# Altium PCB Jukebox PCB.PCBDOC (part 2 of 3)
Units mil, origin at the board's own origin, x right, y up, seen from the top; angles counter-clockwise.
Board outline 8310.03 x 5810.03 mil, 2 copper layers (Top Layer, Bottom Layer); 100 components, 181 nets, 737 pads, 268 vias.
Unrouted connection lines stored in the file: 109.
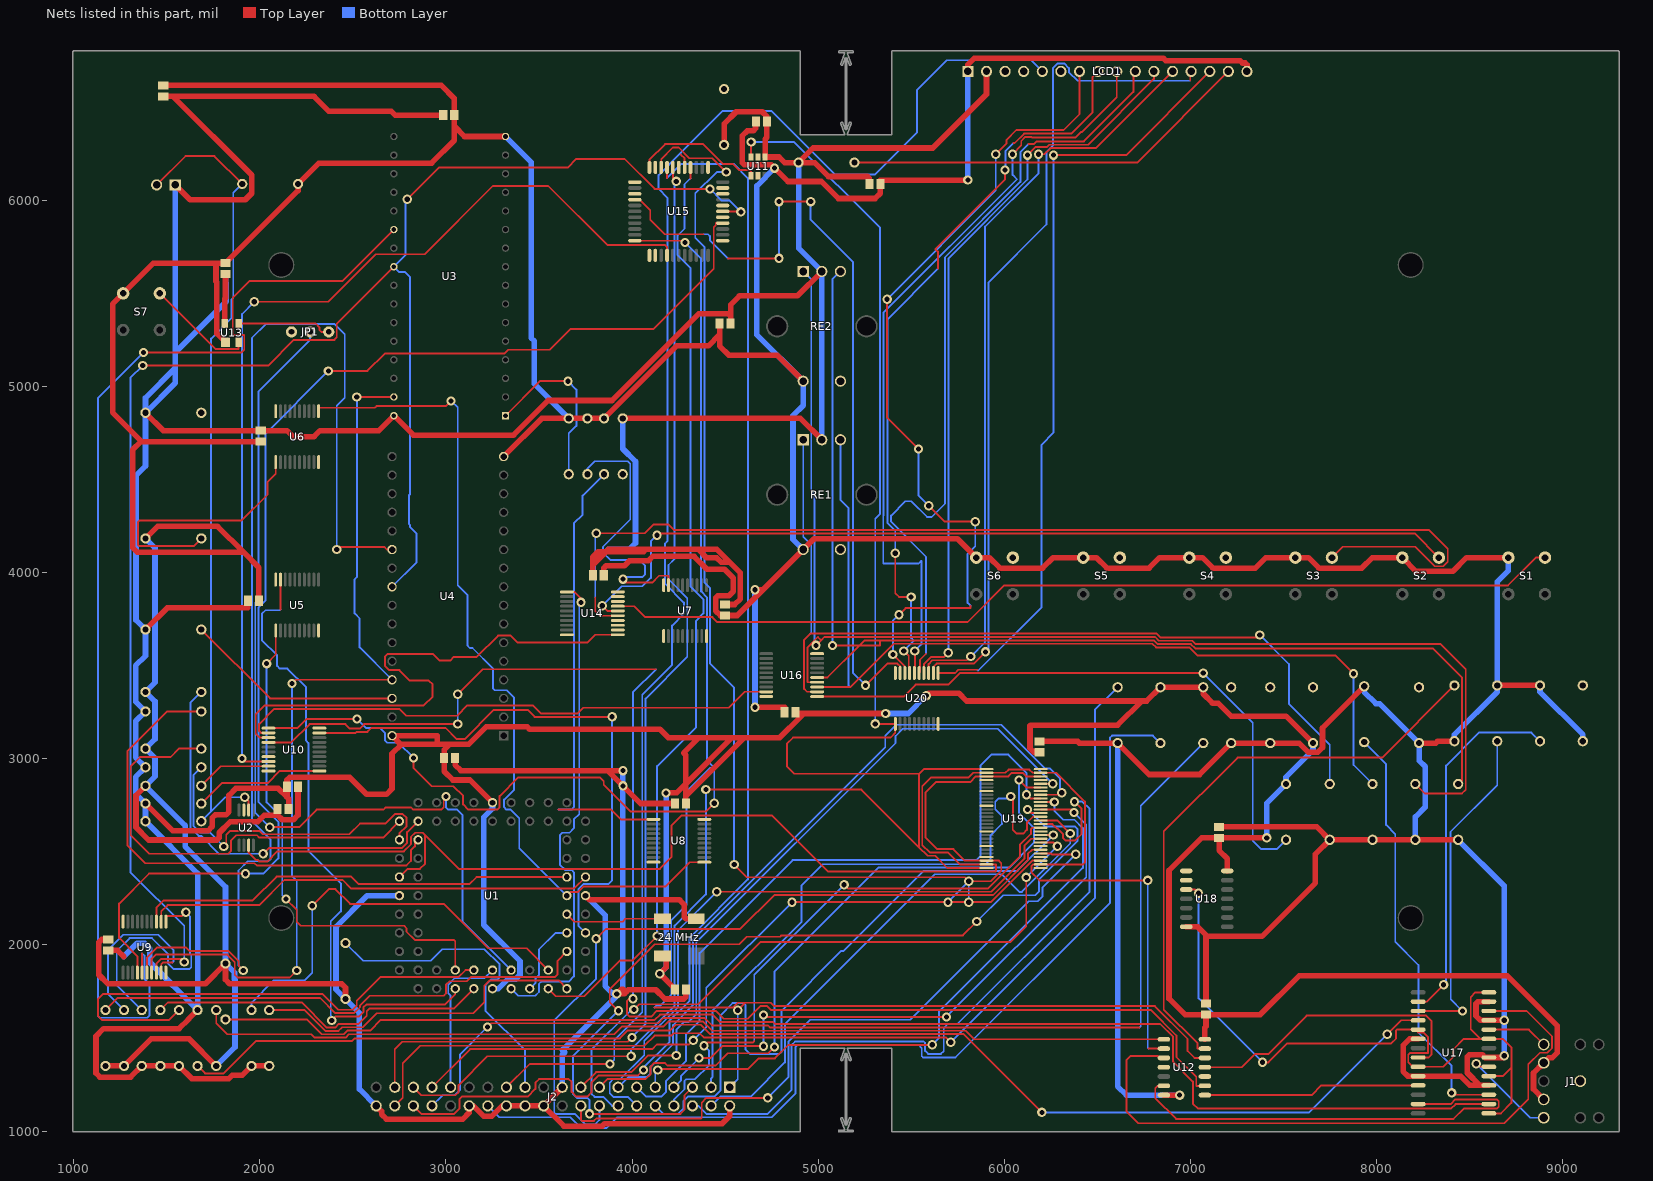
[diagram p2: the nets of this part, all layers, seen from the top]

## Via types
v1: diameter 50, hole 28, Top Layer to Bottom Layer, 268 vias

## Nets (pads, with @x,y where several pads share a name; then routed paths per layer and width w, separated by ;. In a path a pad name is that pad's centre, name@x,y a point inside that pad or via, vN(x,y) a via of type N, cw(c..) or ccw(c..) an arc to the next point about the centre after c; other vN are vias at no path point) (continued)
GND: "24 MHz.2" C0.2 C1.2 C2.2 C3.2 C4.2 C5.2 C6.2 C7.2 C8.2 C9.2 C10.2 C11.2 C12.2 C13.2 C14.2 C15.2 C16.2 C23.2 C24.2 C25.2 J2.2 J2.19 J2.22 J2.24 J2.26 J2.30 J2.40 LCD1.1 LCD1.16 R3.1 R5.1 R6.1 R7.1 R8.1 R9.1 R10.1 R11.1 R12.1 R16.2 R21.1 R22.1 R28.1 R29.1 R30.1 R31.1 R33.1 R34.2 R35.2 R36.1 R37.2 R38.1 R40.1 R41.1 R44.1 R45.1 RE1.5 RE2.5 S1.1 S2.1 S3.1 S4.1 S5.1 S6.1 S7.1 U1.26 U1.60 U2.3 U3.16 U4.16 U5.10 U6.10 U7.10 U8.10 U9.10 U10.10 U11.2 U12.7 U13.1 U14.10 U15.1 U15.23 U16.10 U17.6 U17.10 U17.18 U17.21 U17.25 U17.27 U18.7 U19.4 U19.11 U19.18 U19.25 U19.32 U19.39 U19.46 U19.53 U20.10 | length 53553.1
  Top Layer w30: R21.1@1170,1350 R9.1@1270,1350 1415,1495 1620,1495 R12.1@1765,1350 ; C9.2@1185,2029.53 1150,2029.53 1134,2013.53 1134,1840 1183,1791 1706,1791 R16.2@1815,1900 1815,1813.97 1837.97,1791 2440,1791 2460,1771 R45.1@2460,1710 ; R10.1@1385,2855 1334,2804 1334,2632.29 1402.29,2564 1769,2564 1781.35,2576.35 1781.35,2602.73 1840,2661.38 1988.06,2661.38 2024.21,2697.53 2095.47,2697.53 ; R6.1@1385,4185 1450,4250 1772,4250 1911,4111 ; C0.2@1480,6619.53 2975,6619.53 3044.53,6550 C3.2@3044.53,6460 3044.53,6400 ; U13.1@1815,5240 1769,5286 1769,5561 1764,5566 1764,5650 1778.53,5664.53 ; C5.2@1994.53,3850 1994.53,4027.47 1911,4111 ; C6.2@2005,4705.47 1364.53,4705.47 ; C2.2@2095.47,2730 2095.47,2697.53 ; C10.2@2204.53,2850 2204.53,2697.53 2180,2673 2120,2673 2095.47,2697.53 ; J2.40@2625,1135 2654.1,1105.9 2654.1,1090 2680.01,1064.09 3090.65,1064.09 3125,1098.44 J2.30@3125,1135 3147,1135 3202,1080 3247,1080 3302,1135 J2.26@3325,1135 J2.24@3425,1135 J2.22@3525,1135 ; C4.2@3049.53,3005 3049.53,2968 3080.53,2937 3869,2937 ; U4.16@3310,4625 3515,4830 R3.1@3660,4830 R7.1@3760,4830 R8.1@3850,4830 4240,5220 4410.47,5220 4470.47,5280 ; U3.16@3320,6345 3099.53,6345 3044.53,6400 ; J2.19@3625,1235 J2.22@3525,1135 ; U1.60@3750,2265 3773,2242 4255,2242 4280,2217 4280,2150.79 4290,2140.79 4345,2140.79 ; C14.2@3848.15,3987.05 3848.15,4025.15 3860,4037 3958,4037 3985.9,4064.9 4087.98,4064.9 4111,4087.93 4334.07,4087.93 4402.74,4019.26 4496.74,4019.26 4544,3972 4544,3900 4520,3876 4460.08,3876 4449.09,3865.01 4449.09,3796.38 4475,3770.47 C7.2@4500,3770.47 4565.47,3770.47 4704,3909 ; v1(3951,2937) 3869,2937 ; C8.2@4230.47,2760 4046,2760 v1(3951,2855) 3869,2937 ; C12.2@4289.53,1760 4289.53,1720 4279.03,1709.5 4177,1709.5 4127.5,1759 3980,1759 3967.43,1746.43 ; C15.2@4470.47,5340 4470.47,5280 ; J2.2@4525,1135 4525,1080 4485,1040 3853.34,1040 3839.34,1026 3634,1026 J2.22@3525,1135 ; v1(4661,3278) 4820.47,3278 C16.2@4820.47,3250 ; v1(4661,3909) 4704,3909 ; C11.2@4665.47,6425 4665.47,6390 4651.47,6376 4620,6376 4592,6348 4592,6204.2 4604.1,6192.1 4749,6192.1 v1(4766.1,6175) 4838.1,6103 5018,6103 5109,6012 5306.53,6012 5334.53,6040 C1.2@5334.53,6090 5334.53,6111 v1(5805,6111) ; RE2.5@4920,5030 4780,5170 4520,5170 4470.47,5219.53 4470.47,5280 ; LCD1.1@5805,6695 5805,6731 5840,6766 6855,6766 6868,6753 7268,6753 7281,6740 7295,6740 7305,6730 LCD1.16@7305,6695 ; C24.2@6190,3094.53 6395,3094.53 6404.53,3085 R44.1@6610,3085 6779,2916 7051,2916 R41.1@7220,3085 R40.1@7430,3085 7585,3085 7635.46,3034.54 7684.54,3034.54 7711,3061 7711,3166 R34.2@7935,3390 ; U12.7@6858.46,1192.8 v1(6943,1192.8) ; U18.7@6978.46,2097.8 7040,2097.8 7085,2052.8 7085,2046 ; C23.2@7085,1684.53 7085,2046 ; C25.2@7155,2634.53 7680.47,2634.53 R28.1@7750,2565 ; U17.6@8225,1495 8179.1,1495 8144.1,1460 8144.1,1320 8169.1,1295 U17.10@8225,1295 8453,1295 8503,1245 8557,1245 ; R38.1@8230,3085 8320,3085 8330,3095 R36.1@8420,3095 ; R31.1@8440,2565 R30.1@8210,2565 R29.1@7980,2565 R28.1@7750,2565 ; U17.18@8605,1245 8557,1245 ; U17.27@8605,1695 8546,1695 8536,1685 8536,1619 8560,1595 U17.25@8605,1595 v1(8688,1595) ; R37.2@8650,3395 R35.2@8880,3395 ; v1(8688,1405) 8678,1395 U17.21@8605,1395 8585,1395 8571,1409 8500,1409 8489,1398 8489,1313 8557,1245 ; S1.1@8710,4081.85 8485.58,4081.85 8411.22,4007.48 8214.37,4007.48 S2.1@8140,4081.85 7979,4081.85 7922.15,4025 7692,4025 7635.15,4081.85 S3.1@7565,4081.85 7406.85,4081.85 7350,4025 7121.85,4025 7065,4081.85 S4.1@6995,4081.85 6836,4081.85 6779.15,4025 6552,4025 6495.15,4081.85 S5.1@6425,4081.85 6264,4081.85 6207.15,4025 5977,4025 5920.15,4081.85 S6.1@5850,4081.85 5748.85,4183 4978,4183 RE1.5@4920,4125 4704,3909 ; 1364.53,4705.47 1360,4705.47 1316,4661.47 1316,4135 1340,4111 1911,4111 ; 1364.53,4705.47 1208,4862 1208,5444.85 S7.1@1265,5501.85 1427.68,5664.53 1778.53,5664.53 ; 1778.53,5664.53 C13.2@1815,5664.53 2205,6054.53 R22.1@2205,6090 2317,6202 2922.53,6202 3044.53,6324 3044.53,6400 ; v1(3918,1737) 3943.85,1762.85 3951,1762.85 ; v1(3918,1737) 3958,1737 3967.43,1746.43 ; v1(3918,1737) 3951,1762.85 ; 3951,1762.85 3967.43,1746.43 ; 7085,2046 7386,2046 7673,2333 7673,2488 R28.1@7750,2565
  Bottom Layer w30: R6.1@1385,4185 1436,4134 1436,3411 R11.1@1385,3360 1436,3309 1436,3106 R5.1@1385,3055 1436,3004 1436,2906 R10.1@1385,2855 1598,2642 1598,2529 1815,2312 R16.2@1815,1900 1863.37,1851.63 1863.37,1815 1866,1812.37 1866,1451 R12.1@1765,1350 ; J2.40@2625,1135 2535,1225 2535,1635 R45.1@2460,1710 2409,1761 2409,2097 2577,2265 U1.26@2750,2265 ; U3.16@3320,6345 3458,6207 3458,5262.96 3474.9,5246.06 3474.9,5015.1 R3.1@3660,4830 ; J2.19@3625,1235 3625,1409.73 3638.56,1423.29 3625,1436.85 3628.85,1436.85 3951,1759 3951,1762.85 v1(3951,2855) v1(3951,2937) ; U1.60@3750,2265 3855,2160 3855,1780 3898,1737 v1(3918,1737) ; v1(4661,3278) v1(4661,3909) ; v1(4766.1,6175) 4671,6079.9 4671,5279 RE2.5@4920,5030 4920,4900 4865,4845 4865,4180 RE1.5@4920,4125 ; v1(5805,6111) LCD1.1@5805,6695 ; R44.1@6610,3085 6610,1240 6657.2,1192.8 v1(6943,1192.8) ; R34.2@7935,3390 7935,3360 7998,3297 8018,3297 R38.1@8230,3085 8230,2991 8263,2958 8263,2741 8210,2688 R30.1@8210,2565 ; R36.1@8420,3095 8420,3130 8650,3360 R37.2@8650,3395 8650,3639 8651,3640 8651,3953 8710,4012 S1.1@8710,4081.85 ; R31.1@8440,2565 8688,2317 v1(8688,1595) v1(8688,1405) ; R35.2@8880,3395 8880,3360 9110,3130 R33.1@9110,3095
LCS: U4.22 U9.16 | length 6310.4
  Top Layer w10: U9.16@1392.64,1851.38 1392.64,1930.64 1449,1987 1602,1987 1621,1968 1830.46,1968 1886,1912.46 1886,1888 v1(1911,1863) ; v1(2413,4125) 2427,4139 2669,4139 2683,4125 U4.22@2710,4125
  Bottom Layer w10: v1(1911,1863) 1885,1889 1885,2400 1935,2450 2046,2450 2056,2460 2056,2568 1957,2667 1957,5262 2033,5338 2400,5338 2456,5282 2456,4940 2413,4897 v1(2413,4125)
"Net24 MHz_3": "24 MHz.3" U1.59 | length 537
  Top Layer w10: U1.59@3650,2165 3690,2125 3949,2125 3964.79,2140.79 4163.9,2140.79
NetJ1_A: J1.A U17.20 | length 557.6
  Top Layer w10: v1(8537,1361) 8553,1345 U17.20@8605,1345
  Bottom Layer w10: v1(8537,1361) 8826.7,1071.3 J1.A@8900,1071.3
NetJ1_D: J1.D U17.24 | length 328.1
  Top Layer w10: U17.24@8605,1545 8820,1545 J1.D@8900,1465
NetJ1_E: J1.E R41.2
NetJ2_1: J2.1 U10.11 U12.12 U15.11 | length 11335.2
  Top Layer w10: U10.11@2046.38,3165.31 2201.31,3165.31 2250,3214 v1(2522,3214) ; v1(2826,3005) 2826,2950 2923,2853 3040,2853 3092,2801 3092,2755 3120,2727 3275,2727 3288,2740 3288,2800 3388.44,2900.44 3827.56,2900.44 3848,2880 3848,2861 3991,2718 4399,2718 v1(4442,2761) ; U15.11@4015,5785.04 4274.96,5785.04 v1(4285,5775) ; 4120.5,1663.5 4542.5,1663.5 4568,1689 4608,1689 ; v1(4568,1649) 4608,1689 ; U12.12@7078.94,1392.8 7023,1392.8 6985.5,1430.3 6985.5,1496.1 6810.59,1671 4763.96,1671 4745.96,1689 4608,1689
  Bottom Layer w10: v1(2522,3214) 2571,3165 2647,3165 2672,3140 2672,3100 2685,3087 2744,3087 v1(2826,3005) ; 4120.5,1663.5 4130,1673 4151,1673 4211,1733 4211,2133 4292,2214 4292,2824 4420,2952 4430,2952 4442,2940 ; v1(4285,5775) 4371,5689 4371,3900 4402,3869 4402,2992 4442,2952 4442,2940 ; v1(4442,2761) 4442,2940 ; J2.1@4525,1235 4568,1278 v1(4568,1649)
NetJ2_3: J2.3 U19.43 | length 3208.8
  Top Layer w10: v1(6035,2798) 6048,2785 6048,2676 6046,2674 6046,2620 6068,2598 6102,2598 6122,2618 6122,2656.1 6155,2689.1 U19.43@6196.34,2689.1
  Bottom Layer w10: J2.3@4425,1235 4425,1282 4432,1289 4432,1646 4911,2125 4911,2321 5024,2434 5900,2434 5926,2460 5926,2588 5988,2650 5988,2694 5952,2730 5952,2770 5970,2788 6025,2788 v1(6035,2798)
NetJ2_4: J2.4 U19.42 | length 2954.6
  Top Layer w10: U19.42@6196.34,2669.41 6284.21,2669.41 v1(6355.2,2598.42)
  Bottom Layer w10: J2.4@4425,1135 4475,1185 4638,1185 4822,1369 4822,1574 5628,2380 5986,2380 6081,2285 6095,2285 6355.2,2545.2 v1(6355.2,2598.42)
NetJ2_5: J2.5 U19.44 | length 4855.6
  Top Layer w10: v1(3771,1092) 4260,1092 4282,1114 4282,1192 J2.5@4325,1235 ; v1(3927,1646) 3880,1693 3880,1761 4123,2004 4577,2004 4617,2044 4796,2044 4803,2051 5778,2051 v1(5853,2126) ; v1(6126,2728) 6145.22,2708.78 U19.44@6196.34,2708.78
  Bottom Layer w10: v1(3771,1092) 3771,1167 3760,1178 3704,1178 3682,1200 3682,1401 v1(3927,1646) ; v1(5853,2126) 5994,2267 6166.7,2267 6187.57,2287.86 6187.57,2352.11 6395,2559.54 6395,2622 6380,2637 6217,2637 v1(6126,2728)
NetJ2_6: J2.6 U19.41 | length 3956.9
  Top Layer w10: U19.41@6196.34,2649.73 6259.27,2649.73 6284.14,2624.86 6287.14,2624.86 6317.2,2594.8 6317.2,2573.22 6330,2560.42 6380,2560.42 6415.84,2596.25 6415.84,2732.16 v1(6378,2770)
  Bottom Layer w10: J2.6@4325,1135 4357.1,1135 4400,1092.1 4729.1,1092.1 4858,1221 4858,1463 4876,1481 5567.18,1481 5575,1473.18 5575,1430.18 5591.18,1414 5660,1414 5675,1429 5675,1553 5697,1575 5748,1575 6459,2286 6459,2731 6420,2770 v1(6378,2770)
NetJ2_7: J2.7 U19.45 | length 3363.5
  Top Layer w10: v1(4360,1392) 4421,1392 4485,1456 v1(4707,1456) ; v1(4707,1623) 4717,1613 v1(5690,1613) ; U19.45@6196.34,2728.47 6358.53,2728.47 v1(6375,2712)
  Bottom Layer w10: J2.7@4225,1235 4264,1274 4264,1296 v1(4360,1392) ; v1(4707,1456) v1(4707,1623) ; v1(5690,1613) 6441,2364 6441,2646 v1(6375,2712)
NetJ2_8: J2.8 U19.40 | length 3013
  Top Layer w10: v1(4387,1458) 4404,1475 4649,1475 4657,1483 ; v1(5140,2324) 5160,2304 5914.68,2304 6085,2474.32 6085,2537.54 6143.73,2596.27 6143.73,2621.73 6152.04,2630.04 U19.40@6196.34,2630.04
  Bottom Layer w10: J2.8@4225,1135 4225,1168 4282,1225 4282,1268.9 4291,1277.9 4337.9,1277.9 4414,1354 4414,1431 v1(4387,1458) ; 4657,1483 4657,1841 v1(5140,2324)
NetJ2_9: J2.9 U19.47 | length 3442.4
  Top Layer w10: v1(4138,1328) 4144,1334 4624.4,1334 4680.4,1390 4768,1390 4841,1463 v1(5613,1463) ; U19.47@6196.34,2767.84 v1(6270,2767.84)
  Bottom Layer w10: J2.9@4125,1235 4125,1315 v1(4138,1328) ; v1(5613,1463) 5649,1499 5649,1640 6423,2414 6423,2628 6378,2673 6317,2673 6270,2720 v1(6270,2767.84)
NetJ2_10: J2.10 U19.38 | length 3600.3
  Top Layer w10: U19.38@6196.34,2590.67 v1(6264,2590.67)
  Bottom Layer w10: J2.10@4125,1135 4167.9,1092.1 4247.1,1092.1 4275,1120 4275,1160 4300,1185 4442,1185 4476,1219 4476,1623 4540,1687 4600,1687 4609.4,1677.6 4609.4,1440 4636.4,1413 4790,1413 4804,1427 4804,1647 5125,1968 5137,1968 5567,2398 6071.33,2398 v1(6264,2590.67)
NetJ2_11: J2.11 U19.48 | length 3735.3
  Top Layer w10: v1(6120,2807.52) 6140,2787.52 U19.48@6196.34,2787.52
  Bottom Layer w10: J2.11@4025,1235 4074,1186 4160,1186 4182,1208 4182,1268.24 4291,1377.24 4291,1521 4363,1593 4363,1955.82 4863.18,2456 5849,2456 5873,2480 5873,2965 5931,3023 6022.41,3023 6120,2925.41 v1(6120,2807.52)
NetJ2_12: J2.12 U19.37 | length 3417.4
  Top Layer w10: v1(4455,2286) 5931.77,2286 6109,2463.23 6109,2533.99 6146,2570.99 U19.37@6196.34,2570.99
  Bottom Layer w10: J2.12@4025,1135 3977,1183 3900,1183 3880,1203 3880,1260 3900,1280 3938,1280 4065.65,1407.65 4065.65,1484.24 4247,1665.59 4247,2078 v1(4455,2286)
NetJ2_13: J2.13 U19.49 | length 3826.1
  Top Layer w10: U19.49@6196.34,2807.21 6299.21,2807.21 v1(6310,2818)
  Bottom Layer w10: J2.13@3925,1235 3980,1290 4080,1290 4100,1310 4100,1346.42 4220.15,1466.56 4220.15,1568.83 4327,1675.68 4327,2028 5361.02,3062.02 5361.02,3125.39 5418.99,3183.36 5984.64,3183.36 6220,2948 6248,2948 6300,2896 6300,2828 v1(6310,2818)
NetJ2_14: J2.14 U19.36 | length 3615.9
  Top Layer w10: v1(4010,1653) 4038.5,1681.5 4356.5,1681.5 4691,2016 6035.03,2016 6119,2099.97 v1(6119,2363) ; U19.36@6196.34,2551.3 6264.7,2551.3 v1(6286,2530)
  Bottom Layer w10: J2.14@3925,1135 3893,1135 3845.1,1182.9 3799.1,1182.9 3782,1200 3782,1436.45 3998.55,1653 v1(4010,1653) ; v1(6119,2363) v1(6286,2530)
NetJ2_15: J2.15 U19.51 | length 3656.3
  Top Layer w10: J2.15@3825,1235 3870,1280 4074,1280 4100,1306 4100,1346 4120,1366 4176.38,1366 4190.38,1352 4449,1352 4515,1418 4733,1418 v1(4766,1451) ; v1(6080,2886.58) 6120,2846.58 U19.51@6196.34,2846.58
  Bottom Layer w10: v1(4766,1451) 4766,1858 5324,2416 6027,2416 6160,2549 6160,2629 6080,2709 v1(6080,2886.58)
NetJ2_16: J2.16 U19.34 | length 3992.1
  Top Layer w10: v1(3807,2033) 3860,2086 4582,2086 4764,2268 5940,2268 6128.04,2456.04 6128.04,2490.04 6149.93,2511.93 U19.34@6196.34,2511.93
  Bottom Layer w10: v1(3807,2033) 3807,1819 3582,1594 3582,1097.1 3587,1092.1 3692.9,1092.1 3750.9,1034.1 3800,1034.1 3825,1059.1 J2.16@3825,1135
NetJ2_17: J2.17 U19.52 | length 3852.7
  Top Layer w10: J2.17@3725,1235 3807,1317 3996,1317 4084.57,1405.57 v1(4238.15,1405.57) ; U19.52@6196.34,2866.26 v1(6261.74,2866.26)
  Bottom Layer w10: v1(4238.15,1405.57) 4238.15,1544.72 4277.56,1584.13 4302.13,1584.13 4345,1627 4345,2013.46 5416,3084.46 5416,3122 5456,3162 5966,3162 v1(6261.74,2866.26)
NetJ2_18: J2.18 U19.33 | length 3709.9
  Top Layer w10: J2.18@3725,1135 3725,1060 3731,1054 3795,1054 3809,1068 4372,1068 4375,1071 4375,1153 4400,1178 v1(4729,1178) ; U19.33@6196.34,2492.25 6251,2492.25 6256.25,2487 v1(6385,2487)
  Bottom Layer w10: v1(4729,1178) 4840,1289 4840,1480 4958,1598 5496,1598 6132.66,2234.66 6180.58,2234.66 6205.92,2260 6205.92,2307.92 v1(6385,2487)
NetJ2_23: J2.23 R45.2 | length 1726
  Bottom Layer w10: R45.2@2460,2010 2555,1915 2919,1915 2981,1977 3206,1977 3288,1895 3288,1827 3275,1814 3242,1814 3212,1784 3212,1646 3425,1433 J2.23@3425,1235
NetJ2_25: J2.25 LCD1.5 U15.38 | length 8463.5
  Top Layer w10: J2.25@3325,1235 3450,1360 v1(3882,1360) ; 4261.72,6248 4282.72,6227 U15.38@4282.72,6178.74
  Bottom Layer w10: v1(3882,1360) 3904.64,1382.64 3904.64,1487.64 4055,1638 4055,3344.9 4215,3504.9 4215,3716 4279,3780 4279,3840 4178,3941 4178,4157.53 4190,4169.53 4190,6016 4143,6063 4143,6138 4261.72,6256.72 ; 4261.72,6248 4261.72,6256.72 ; LCD1.5@6205,6695 6145,6755 5692,6755 5531,6594 5531,6366 5306,6141 5090,6141 4748,6483 4488,6483 4261.72,6256.72
NetJ2_28: J2.28 R43.1 | length 5302.2
  Bottom Layer w10: J2.28@3225,1135 3285.9,1074.1 3669,1074.1 3727,1016.1 3862.9,1016.1 3920.9,1074.1 4750.1,1074.1 4879,1203 4879,1452 4890,1463 5539.85,1463 5557,1445.85 5557,1402.83 5564.75,1395.09 5737.59,1395.09 6569.54,2227.03 6569.54,3115 6580,3125.46 6799.54,3125.46 R43.1@6840,3085
NetJ2_31: J2.31 U1.44 | length 827.7
  Bottom Layer w10: J2.31@3025,1235 3025,1727 3012,1740 3012,1787 3045.9,1820.9 3205.9,1820.9 U1.44@3250,1865
NetJ2_33: J2.33 U15.42 U19.3 U19.26 U19.31 U19.54 | length 11465.4
  Top Layer w10: J2.33@2925,1235 3130,1440 4109,1440 4134,1465 4307,1465 v1(4329,1487) ; U15.42@4156.73,6178.74 4156.73,6222.73 4220,6286 4250,6286 4308,6228 4432,6228 v1(4506,6154) ; v1(4549,2432) 4617,2364 5788,2364 v1(5810,2342) 5927.23,2342 5984.72,2399.49 5984.72,2440 5971.84,2452.88 U19.26@5905,2452.88 5789,2452.88 5726.88,2515 5640,2515 5578,2577 5578,2820.72 5632.91,2875.63 5816.63,2875.63 5846.63,2905.63 U19.3@5905,2905.63 6023.05,2905.63 6042,2924.58 6099.05,2924.58 6118,2905.63 U19.54@6196.34,2905.63 ; v1(4860,2230) v1(5698,2230) v1(5810,2230) 5928,2230 6150.87,2452.87 U19.31@6196.34,2452.87
  Bottom Layer w10: v1(4329,1487) 4399,1557 4399,1769 v1(4860,2230) ; v1(4506,6154) 4455,6154 4340,6039 4340,5800.47 4389,5751.47 4389,3949 4420,3918 4420,3512 4549,3383 v1(4549,2432) ; v1(5698,2230) v1(5810,2342) v1(5810,2230)
NetJ2_34: J2.34 R42.1 | length 5801.6
  Top Layer w10: v1(3223,1559) 3243,1579 4140.15,1579 4169.15,1608 4389,1608 4430,1567 4731,1567 4741,1557 6728,1557
  Bottom Layer w10: J2.34@2925,1135 2982,1192 3047,1192 3075,1220 3075,1411 v1(3223,1559) ; 6728,1557 6734,1563 6734,2749 R42.1@7070,3085
NetJ2_35: J2.35 U11.3 U15.43 U19.1 U19.28 U20.1 | length 10598.3
  Top Layer w10: J2.35@2825,1235 2868,1192 3051,1192 3068,1209 3068,1247 3223,1402 v1(3995,1402) ; v1(4397,2835) 5232.59,2835 5542,2525.59 ; U11.3@4640,6235 v1(4640,6315) ; v1(5307,3188) U20.1@5415,3188 5415,3140 5390,3115 4866,3115 4832,3081 4832,2960 4872,2920 5540.1,2920 5542,2918.1 ; U19.28@5905,2413.5 5694.67,2413.5 5629.17,2479 5588.59,2479 5542,2525.59 ; U19.1@5905,2945 5568.9,2945 5542,2918.1 ; 5542,2525.59 5542,2918.1
  Bottom Layer w10: v1(3995,1402) 3995,1440 4229,1674 4229,2104 4397,2272 v1(4397,2835) ; v1(4640,6315) 4872,6315 5333,5854 5333,4317 5307,4291 v1(5307,3188)
NetJ2_36: J2.36 LCD1.6 U15.41 | length 7121.3
  Top Layer w10: J2.36@2825,1135 2867.9,1092.1 3044.1,1092.1 3072,1120 3072,1171.1 3085.9,1185 3440,1185 3481,1226 3481,1260 3500,1279 3660,1279 3675,1264 3675,1210 3700,1185 3760,1185 3782,1207 3782,1260 3820.7,1298.7 4032,1298.7 v1(4061.3,1328) ; 4188.23,6122.23 U15.41@4188.23,6178.74
  Bottom Layer w10: v1(4061.3,1328) 4061.3,1339.44 4202.15,1480.29 4202.15,1594.06 4309,1700.91 4309,2038 4623,2352 4623,6121.53 4548.22,6196.31 4262.31,6196.31 4188.23,6122.23
NetJ2_37: J2.37 U15.40 | length 6371.4
  Top Layer w10: J2.37@2725,1235 2725,1440 2765,1480 3976.5,1480 v1(3999.5,1503) ; U15.40@4219.72,6178.74 4219.72,6122 v1(4238,6103.72)
  Bottom Layer w10: v1(3999.5,1503) 4073,1576.5 4073,3324 4297,3548 4297,3864 4196,3965 4196,4041.93 4227.34,4073.27 4227.34,6093.07 v1(4238,6103.72)
NetJ2_38: J2.38 R44.2 | length 5559
  Top Layer w10: J2.38@2725,1135 2768,1178 2768,1365 2861,1458 4066,1458 4121,1513 4210.6,1513 4223.15,1525.54 4362.6,1525.54 4385.15,1503 5687,1503 v1(5713,1477)
  Bottom Layer w10: v1(5713,1477) 6488,2252 6488,3263 R44.2@6610,3385
NetJP1_1: JP1.1 U13.3 | length 512.4
  Top Layer w10: U13.3@1885,5340 2300,5340 2320,5320 2320,5305 2330,5295 JP1.1@2370,5295
NetJP1_2: JP1.2 U1.46 | length 4975.3
  Top Layer w10: v1(2053,2633) 2210.5,2633 2304.5,2727 2664.2,2727 2676.1,2738.9 2812,2738.9 2823.9,2727 2975,2727 2988,2740 2988,2786 v1(3000,2798)
  Bottom Layer w10: v1(2053,2633) 1975,2711 1975,3838.33 1993,3856.33 1993,4976 2270,5253 JP1.2@2270,5295 ; v1(3000,2798) 3000,2739 3012,2727 3061,2727 3088,2700 3088,2127 U1.46@3350,1865
NetJP1_3: JP1.3 R25.2
NetLCD1_3: LCD1.3 U11.5
NetLCD1_4: LCD1.4 U15.3
NetLCD1_7: LCD1.7 U20.18 | length 4532
  Top Layer w10: v1(5371,5470.74) 5371,4834 v1(5540,4665) ; v1(5402,3561.26) 5466.18,3497.08 U20.18@5466.18,3461.62 ; v1(5435,3775) 5470,3810 5820,3810 5820,3822.27 ; v1(5595,4360) 5680,4275 v1(5845,4275) ; v1(5955,6250) 6012,6307 6012,6325.74 6066.26,6380 6320,6380 6405,6465 LCD1.7@6405,6695
  Bottom Layer w10: v1(5371,5470.74) 5955,6054.74 v1(5955,6250) ; v1(5402,3561.26) 5402,3742 v1(5435,3775) ; v1(5540,4665) 5540,4415 v1(5595,4360) ; 5820,3822.27 5803.64,3838.64 5803.64,4101.05 5845,4142.42 v1(5845,4275)
NetLCD1_8: LCD1.8 U20.17 | length 3998.2
  Top Layer w10: v1(5415,4105) 5415,3890 5435,3870 v1(5500,3870) ; v1(5460,3580) 5486.96,3553.04 5486.96,3466.44 U20.17@5491.77,3461.62 ; 5644,5634 5644,5726 5630,5740 6005,6115 v1(6005,6165) ; 6050,6308.74 6050,6310 6055.8,6310 6106.8,6361 6361,6361 6475,6475 6475,6665 LCD1.8@6505,6695
  Bottom Layer w10: v1(5415,4105) 5415,4225.8 5374,4266.8 5374,5364 5644,5634 ; v1(5460,3580) 5515,3635 5500,3650 v1(5500,3870) ; v1(6005,6165) 6007,6167 6007,6265.74 6050,6308.74
NetLCD1_9: LCD1.9 U20.16 | length 4180.7
  Top Layer w10: U20.16@5517.36,3461.62 5520,3464.26 v1(5520,3580) ; v1(6045,6250) 6092,6297 6092,6320.74 6114.26,6343 6145.74,6343 6148.74,6340 6385,6340 6415,6370 6420,6370 6605,6555 LCD1.9@6605,6695
  Bottom Layer w10: v1(5520,3580) 5555,3615 5555,4065 5540,4050 5350,4050 5350,4307.54 5351,4308.54 5351,5397 6069,6115 6045,6139 v1(6045,6250)
NetLCD1_10: LCD1.10 U20.15 | length 4240.1
  Top Layer w10: U20.15@5542.95,3461.62 5547.77,3466.44 5547.77,3532.77 5580,3565 ; 6130,6303.74 6130,6305 6160.8,6305 6174.8,6319 6429,6319 6695,6585 6695,6685 LCD1.10@6705,6695
  Bottom Layer w10: 5580,3565 5580,4086.26 5392,4274.26 5392,4307.74 5469.26,4385 5500.74,4385 5585.74,4300 5610,4300 5682,4372 5682,5696.37 6087,6101.37 6087,6260.74 6130,6303.74
NetLCD1_11: LCD1.11 U20.14 | length 3945.1
  Top Layer w10: U20.14@5568.54,3461.62 5568.54,3509.22 5607.25,3547.92 5677.92,3547.92 v1(5700,3570) ; v1(6125,6245) 6168,6288 6228.8,6288 6241.8,6301 6451,6301 6805,6655 LCD1.11@6805,6695
  Bottom Layer w10: v1(5700,3570) 5700,5688.91 6125,6113.91 v1(6125,6245)
NetLCD1_12: LCD1.12 U20.13 | length 4045.9
  Top Layer w10: U20.13@5594.13,3461.62 5594.13,3509.36 5614.7,3529.92 5799.92,3529.92 v1(5820,3550) ; v1(6185,6250) 6216.26,6250 6249.26,6283 6493,6283 LCD1.12@6905,6695
  Bottom Layer w10: v1(5820,3550) 5897,3627 5897,5860.46 6185,6148.46 v1(6185,6250)
NetLCD1_13: LCD1.13 U20.12 | length 4488.7
  Top Layer w10: U20.12@5619.72,3461.62 5624.54,3461.62 5624.54,3499.75 5636.71,3511.92 5836.92,3511.92 v1(5900,3575) ; 7000,6645 7000,6690 LCD1.13@7005,6695
  Bottom Layer w10: v1(5900,3575) 5915,3590 5915,5560 6227,5872 6227,6260.74 6262.1,6295.84 6262.1,6712.77 6287.23,6737.9 6322.77,6737.9 6347.9,6712.77 6347.9,6691.43 6394.33,6645 7000,6645
NetLCD1_14: LCD1.14 U20.11 | length 4187.7
  Top Layer w10: U20.11@5645.32,3461.62 5736.43,3461.62 5753.8,3479 5856,3479 ; v1(6265,6245) 6655,6245 LCD1.14@7105,6695
  Bottom Layer w10: 5856,3479 5860,3475 6201,3816 6201,4688.46 6265,4752.46 v1(6265,6245)
NetLCD1_15: LCD1.15 R1.1 | length 2213
  Top Layer w10: R1.1@5195,6205 6715,6205 LCD1.15@7205,6695
NetPB1_2: PB1.2 R2.2 R22.2 U2.2 | length 4392.4
  Top Layer w10: PB1.2@1445,6085 1600,6240 1755,6240 R22.2@1905,6090 ; v1(1919,2794) 1939.41,2773.59 U2.2@1939.41,2725
  Bottom Layer w10: R2.2@1685,2665 1738,2718 ; R22.2@1905,6090 1857,6042 1857,5479 1847,5469 1847,5368 1738,5259 1738,2718 ; v1(1919,2794) 1814,2794 1738,2718
NetR3_2: R3.2 U3.1 | length 948.3
  Top Layer w10: U3.1@3320,4845 3505,5030 v1(3656,5030)
  Bottom Layer w10: v1(3656,5030) 3701,4985 3701,4790 3660,4749 R3.2@3660,4530
NetR4_1: R4.1 U4.30 | length 1178.3
  Top Layer w10: R4.1@1685,3695 2055,3325 U4.30@2710,3325
NetR5_2: R5.2 U1.18 | length 2389.1
  Top Layer w10: R5.2@1685,3055 1565,3055 1520,3010 1356,3010 1306,2960 1306,2590 1405.65,2490.35 1830,2490.35 1844,2504.35 1844,2560 1873.68,2589.68 1984.32,2589.68 1997,2577 2662,2577 U1.18@2750,2665
NetR6_2: R6.2 U6.1 | length 1431.7
  Top Layer w10: R6.2@1685,4185 1644,4144 1352,4144 1344,4152 1344,4271 1355,4282 1902,4282 2041,4421 2041,4489 2085,4533 U6.1@2085,4595
NetR7_2: R7.2 U7.19 | length 1570.1
  Top Layer w10: v1(3951,3966) 3970,3947 4108,3947 4145,3984 4195.59,3984 U7.19@4195.59,3933.62
  Bottom Layer w10: R7.2@3760,4530 3760,4559.56 3800,4599.56 3977.76,4599.56 3990.46,4586.86 3990.46,4286.53 3843.93,4140 3843.93,4109.07 3884,4069 4040,4069 4069,4040 4069,3990 4056,3977 3962,3977 v1(3951,3966)
NetR8_2: R8.2 U8.1 | length 2476.8
  Top Layer w10: 3605.1,2727.1 3887.9,2727.1 3940,2675 U8.1@4115,2675
  Bottom Layer w10: 3605.1,2727.1 3675.1,2727.1 3688,2740 3688,4265.71 3734.7,4312.4 3734.7,4414.7 R8.2@3850,4530
NetR9_2: R9.2 U9.19 | length 956.2
  Top Layer w10: U9.19@1469.41,1851.38 1469.41,1895.41 1480,1906 1530,1906
  Bottom Layer w10: R9.2@1270,1650 1184,1736 1184,1973 1266,2055 1454,2055 1535,1974 1535,1911 1530,1906
NetR10_2: R10.2 U10.19 | length 405.1
  Top Layer w10: R10.2@1685,2855 1790.59,2960.59 U10.19@2046.38,2960.59
NetR11_2: R11.2 U1.19 | length 2142
  Top Layer w10: v1(2017.35,2490.35) 2047.9,2520.9 2762.9,2520.9 2791.3,2549.3 2791.3,2606.3 U1.19@2850,2665
  Bottom Layer w10: R11.2@1685,3360 1626,3301 1626,2630 1670.25,2585.75 1684.6,2585.75 1780,2490.35 v1(2017.35,2490.35)
NetR12_2: R12.2 U12.1 | length 5271.7
  Top Layer w10: R12.2@1765,1650 1765,1580 1825.26,1519.74 2276.26,1519.74 2294,1502 2460.26,1502 2478,1519.74 3904.24,1519.74 3945.5,1561 4168.15,1561 4196.21,1589.06 4379.94,1589.06 4430,1539 5792.56,1539 5838.77,1492.8 U12.1@6858.46,1492.8
NetR13_1: R13.1 U17.4 | length 7085.2
  Top Layer w10: R13.1@1665,1350 1705.46,1309.54 1806,1309.54 1980.46,1484 2496,1484 2510,1498 3935,1498 3978,1541 4205.15,1541 4235.21,1571.06 4369.94,1571.06 4420,1521 5781.81,1521 v1(6202.81,1100) ; v1(8059,1520) 8134,1595 U17.4@8225,1595
  Bottom Layer w10: v1(6202.81,1100) 7639,1100 v1(8059,1520)
NetR14_2: R14.2 U1.42 | length 2728.7
  Top Layer w10: R14.2@1565,1650 1511,1596 1153,1596 1129,1620 1129,1708 1158,1737 2334.54,1737 2420,1651.54 2498,1651.54 2520.46,1674 2520.46,1700.63 2646.93,1827.1 3067.1,1827.1 3105,1865 U1.42@3150,1865
NetR15_2: R15.2 U15.13
NetR16_1: R16.1 U17.16 | length 7234.4
  Top Layer w10: R16.1@1815,1600 2251.34,1600 2331.34,1520 2450.46,1520 2470,1539.54 2592,1539.54 2649.46,1597 4122.15,1597 4151.15,1626 4433,1626 4474,1585 4759,1585 4769,1575 6838.67,1575 6908.34,1505.32 6908.34,1371.33 7014.57,1265.1 7014.57,1147.43 7042,1120 8401,1120 8426,1145 U17.16@8605,1145
NetR17_2: R17.2 U7.1
NetR18_2: R18.2 U1.50 | length 2278.7
  Top Layer w10: v1(2281,2211) 2370,2300 2406,2300 2485,2221 2989,2221 3228,1982 3433,1982 U1.50@3550,1865
  Bottom Layer w10: R18.2@1955,1650 1955,1690 2075,1810 2240,1810 2281,1851 v1(2281,2211)
NetR19_2: R19.2 U9.1 | length 1359.3
  Top Layer w10: U9.1@1495,2125 1495,2155 1581,2155 v1(1602,2176)
  Bottom Layer w10: R19.2@1365,1650 1230.41,1784.59 1230.41,1967.41 1300,2037 1420,2037 1506.23,1950.77 1506.23,1900 1536.23,1870 1621,1870 1631,1880 1631,1946 1624,1953 1624,2154 v1(1602,2176)
NetR20_2: R20.2 U10.1 | length 707.5
  Top Layer w10: R20.2@1685,2760 1795,2870 2041,2870 2106,2935 U10.1@2320,2935
NetR21_2: R21.2 U1.55 | length 2752.5
  Top Layer w10: R21.2@1170,1650 1235,1715 2323,1715 2404.46,1633.54 2505.46,1633.54 2538.46,1666.54 2538.46,1674.92 2590.54,1727 2988,1727 3000,1739 3000,1785 3020,1805 3112,1805 3134.1,1827.1 3585,1827.1 3600,1842.1 3600,1915 U1.55@3650,1965
NetR23_2: R23.2 U1.20 | length 1781.3
  Top Layer w10: v1(1806,2529) 1819,2542 1819,2592 1840,2613 1997,2613 2015,2595 2481,2595 2538,2652 2674.1,2652 2725,2702.9 2768,2702.9 2788,2682.9 2788,2638 2750,2600 U1.20@2750,2565
  Bottom Layer w10: R23.2@1685,2955 1644,2914 1644,2638 1677,2605 1730,2605 v1(1806,2529)
NetR24_2: R24.2 U1.21 | length 2699.3
  Top Layer w10: R24.2@1685,3255 1503,3255 1288,3040 1288,2535 1383.81,2439.19 1970.81,2439.19 1982.9,2427.1 2787.9,2427.1 2811.95,2451.15 2811.95,2508.49 2833.14,2529.69 2833.14,2548.14 U1.21@2850,2565
NetR26_2: R26.2 U1.51 | length 1829.1
  Top Layer w10: R26.2@2050,1650 2240,1650 2352,1538 2422.46,1538 2442,1557.54 2553.54,1557.54 2629,1633 3147,1633 3205.9,1691.9 3205.9,1780.9 3234.1,1809.1 3605.9,1809.1 U1.51@3650,1765
NetR27_2: R27.2 U1.41 | length 1858.6
  Top Layer w10: R27.2@1465,1650 1506,1691 2225,1691 2360,1556 2404,1556 2424,1576 2530.46,1576 2574.46,1620 2574.46,1644.19 2589.27,1659 3044,1659 U1.41@3150,1765
NetR28_2: R28.2 RE1.1 U16.2 | length 4835.3
  Top Layer w10: U16.2@4995,3360.59 4940.41,3360.59 4925,3376 4925,3640 4958,3673 6819.26,3673 6839.26,3653 7361,3653 v1(7374,3666)
  Bottom Layer w10: RE1.1@4920,4715 4920,4194 4962.9,4151.1 4962.9,3677.9 4958,3673 ; v1(7374,3666) 7530,3510 7530,3296 7750,3076 R28.2@7750,2865
NetR29_2: R29.2 RE1.3 U16.3 | length 5032.2
  Top Layer w10: U16.3@4995,3386.18 5173.18,3386.18 5406,3619 6796.89,3619 6816.89,3599 6996,3599 7040,3555 7781,3555 v1(7878,3458)
  Bottom Layer w10: RE1.3@5120,4715 5120,4392 5163,4349 5163,3396.36 5173.18,3386.18 ; v1(7878,3458) 7878,2967 R29.2@7980,2865
NetR30_2: R30.2 RE2.1 U16.4 | length 6910.5
  Top Layer w10: v1(4989.23,3610) 5016.61,3637.39 ; U16.4@4995,3411.77 4944,3411.77 4944,3600 4999,3655 5016.61,3637.39 ; R30.2@8210,2865 8261,2814 8460,2814 8481,2835 8481,3482 8346.28,3616.72 7029.2,3616.72 7010.91,3635 6831.8,3635 6811.8,3655 5034.23,3655 5016.61,3637.39
  Bottom Layer w10: RE2.1@4920,5620 4963,5577 4963,4441 4980.9,4423.1 4980.9,3618.33 v1(4989.23,3610)
NetR31_2: R31.2 RE2.3 U16.5 | length 6523.1
  Top Layer w10: U16.5@4995,3437.36 5050.36,3437.36 5222,3609 ; v1(5077,3609) 5222,3609 ; R31.2@8440,2865 8461,2886 8461,3435 8302.36,3593.64 7026.81,3593.64 7003.46,3617 6824.35,3617 6804.35,3637 5332.26,3637 ; 5222,3609 5250,3637 5332.26,3637 ; 5222,3609 5332.26,3609 5332.26,3637
  Bottom Layer w10: v1(5077,3609) 5077,5577 RE2.3@5120,5620
NetR32_1: R32.1 U16.1 | length 3356.7
  Top Layer w10: U16.1@4995,3335 5460,3335 5524,3399 5699.26,3399 5761.26,3461 v1(7070,3461)
  Bottom Layer w10: v1(7070,3461) 7336,3195 7336,2560 7381,2515 7465,2515 R32.1@7515,2565
NetR33_2: R33.2 U12.4
NetR34_1: R34.1 U17.17 | length 2283.8
  Top Layer w10: v1(8405,1205) 8415,1195 U17.17@8605,1195
  Bottom Layer w10: R34.1@7935,3090 8053,2972 8053,2645 8102,2596 8102,2017 8227,1892 8227,1529 8405,1351 v1(8405,1205)
NetR35_1: R35.1 U17.2 | length 1955.4
  Top Layer w10: U17.2@8225,1695 8271,1695 v1(8362,1786)
  Bottom Layer w10: v1(8362,1786) 8375,1799 8375,2964 8552,3141 8834,3141 R35.1@8880,3095
NetR36_2: R36.2 U12.13 | length 3168.7
  Top Layer w10: U12.13@7078.94,1442.8 7040,1442.8 7040,1470.72 6858,1652.72 6858,2610 7254.54,3006.54 8031.54,3006.54 R36.2@8420,3395
NetR37_1: R37.1 U17.3 | length 1818.5
  Top Layer w10: U17.3@8225,1645 v1(8463,1645)
  Bottom Layer w10: v1(8463,1645) 8400,1708 8400,1824 8399,1825 8399,2608 8650,2859 R37.1@8650,3095
NetR38_2: R38.2 U12.10
NetR39_2: R39.2 U18.2
NetR40_2: R40.2 U18.1
NetRE1_4: RE1.4 U14.8
NetRE2_4: RE2.4 U14.9
NetS1_2: S1.2 U14.7 | length 5162.4
  Top Layer w10: U14.7@3923.62,3820.59 4011.74,3820.59 4070.33,3762 4432,3762 4459,3735 5803,3735 6000,3932 8708,3932 8857.85,4081.85 S1.2@8906.85,4081.85
NetS2_2: S2.2 U14.6 | length 4921.9
  Top Layer w10: v1(3840,3823) 3868,3795 U14.6@3923.62,3795 ; v1(4134,4202) 4144,4212 8206.7,4212 S2.2@8336.85,4081.85
  Bottom Layer w10: v1(3840,3823) 3945,3928 4056,3928 4101,3973 4101,4169 v1(4134,4202)
NetS3_2: S3.2 U14.5 | length 5972.2
  Top Layer w10: 3802,3867 3802,3793.41 3826,3769.41 U14.5@3923.62,3769.41 ; v1(3808,4212.73) 4068.73,4212.73 4116,4260 4195,4260 4224,4231 8282,4231 8384,4129 8384,4059.48 8360,4035.48 8314.52,4035.48 8210,4140 7820,4140 S3.2@7761.85,4081.85
  Bottom Layer w10: 3802,3867 3802,4206.73 v1(3808,4212.73)
NetS4_2: S4.2 U14.4
NetS5_2: S5.2 U14.3
NetS6_2: S6.2 U14.2
NetS7_2: S7.2 U13.2 | length 585.4
  Top Layer w10: S7.2@1461.85,5501.85 1761.7,5202 1885,5202 U13.2@1885,5240
NetU1_24: U1.24 U2.7 U12.2 U15.39 U19.2 U19.27 U19.30 U19.55 | length 8970.2
  Top Layer w10: U2.7@1939.41,2536.02 1939.41,2495.59 1977.81,2457.19 1987.81,2457.19 1997,2448 2039,2448 2093.9,2502.9 2774,2502.9 2812.1,2541 2812.1,2580.7 2834.4,2603 2875,2603 2888,2590 ; U1.24@2750,2365 2794,2409 2860,2409 2888,2437 2888,2590 ; v1(6772,2347) 6190.04,2347 6146.04,2391 6146.04,2422.58 6156.65,2433.19 U19.30@6196.34,2433.19 6424.01,2433.19 6433.84,2443.02 6433.84,2770.8 6279.32,2925.32 U19.55@6196.34,2925.32 6153.26,2925.32 6136,2942.58 6024,2942.58 6006.74,2925.32 U19.2@5905,2925.32 5833.61,2925.32 5808.91,2900.61 5607.51,2900.61 5560,2853.1 5560,2537 5600,2497 5698,2497 5761.81,2433.19 U19.27@5905,2433.19 5956,2433.19 5956,2398 5952.1,2394.1 5053.9,2394.1 4752,2696 4268,2696 4212,2640 4212,2471 4150.1,2409.1 3068.9,2409.1 2888,2590 ; 6776.2,1442.8 U12.2@6858.46,1442.8
  Bottom Layer w10: v1(6772,2347) 6772,1447 6776.2,1442.8
NetU1_39: U1.39 U5.19 | length 3448.2
  Top Layer w10: 2110.59,3802.59 U5.19@2110.59,3963.62 ; v1(2386,1594) 2407.54,1615.54 2534,1615.54 2556.46,1638 2556.46,1664.76 2571.27,1679.57 2994.6,1679.57 3050,1734.97 U1.39@3050,1765
  Bottom Layer w10: 2110.59,3802.59 2107,3799 2030,3799 2011,3780 2011,3638 2092.16,3556.84 2092.16,3500 2106.54,3485.62 2147.55,3485.62 2248,3385.17 2248,3098 2261,3085 2261,2505 2435,2331 2435,2180.59 2381,2126.59 2381,1619 2386,1614 v1(2386,1594)
NetU1_40: U1.40 U5.1 | length 2714.5
  Top Layer w10: v1(2036,3512) 2085,3561 U5.1@2085,3690 ; v1(2140,2247) 2197.9,2189.1 2197.9,2124.1 2219.1,2102.9 2775,2102.9 2787.9,2090 2787.9,2071.2 2832,2027.1 3042.9,2027.1 3050,2020 U1.40@3050,1865
  Bottom Layer w10: v1(2036,3512) 2036,2766 2120,2682 2120,2267 v1(2140,2247)
NetU1_45: U1.45 U14.11 | length 2665.8
  Top Layer w10: U14.11@3650,3897.36 3689.8,3897.36 3726,3861.16 v1(3726,3841)
  Bottom Layer w10: U1.45@3350,1765 3388,1727 3480,1727 3500,1747 3500,1791 3512,1803 3660,1803 3688,1831 3688,2390 3675,2403 3640,2403 3612,2431 3612,2590 3625,2603 3664,2603 3688,2627 3688,2675 3716,2703 3716,3831 v1(3726,3841)
NetU1_47: U1.47 U1.57 | length 418.6
  Bottom Layer w10: U1.47@3450,1765 3482,1797 3482,1820.9 3500,1838.9 3500,1976 3589,2065 U1.57@3650,2065
NetU1_49: U1.49 U15.37 | length 5056
  Top Layer w10: U1.49@3550,1765 3591,1724 3743.88,1724 3937.21,1917.32 4004.32,1917.32 v1(4135,2048) ; 4314.21,6119.79 U15.37@4314.21,6178.74
  Bottom Layer w10: v1(4135,2048) 4135,2961 4344,3170 4344,3742 4384,3782 4384,3858 4314,3928 4314,5638.74 4245.34,5707.4 4245.34,5813 4282,5849.66 4282,6087.58 4314.21,6119.79
NetU1_56: U1.56 U10.9 | length 3018.6
  Top Layer w10: U10.9@2320,3139.72 2514.72,3139.72 2519.87,3144.87 2577.63,3144.87 2598.76,3166 2999,3166 3059,3106 3101,3106 3257.9,3262.9 3439.1,3262.9 3476,3226 v1(3893,3226)
  Bottom Layer w10: U1.56@3750,2065 3712,2103 3712,2300 3739,2327 3872,2327 3893,2348 v1(3893,3226)
NetU1_61: U1.61 U6.11 U8.11 | length 4577.4
  Top Layer w10: U6.11@2315.32,4868.62 2315.32,4887 2618.13,4887 2627.03,4895.9 2999.9,4895.9 v1(3027,4923) ; U1.61@3650,2265 3670,2285 3711,2285 3741,2315 4180,2315 4309.68,2444.68 U8.11@4388.62,2444.68
  Bottom Layer w10: v1(3027,4923) 3029,4923 3063,4889 3063,3933.72 3115,3881.72 3115,3610 3129,3596 3142.54,3596 3252.25,3486.29 3252.25,3380 3263.15,3369.1 3325.9,3369.1 3365.9,3329.1 3365.9,2834.9 3312.1,2781.1 3312.1,2740 3325,2727.1 3347,2727.1 3394.1,2680 3394.1,2520.9 U1.61@3650,2265
NetU1_62: U1.62 U9.2 | length 2449.6
  Top Layer w10: U9.2@1469.41,2125 1469.41,2180 1503.79,2214.38 1997.36,2214.38 2131.98,2349 2444,2349 2489.1,2303.9 3688.9,2303.9 U1.62@3750,2365
NetU1_63: U1.63 U9.3 | length 2382.7
  Top Layer w10: U9.3@1443.82,2125 1443.82,2200 1482.82,2239 1961.84,2239 2089.84,2367 2491,2367 2531,2327 3126,2327 3164,2365 U1.63@3650,2365
NetU9_14: U9.14 U15.26 | length 6772.6
  Top Layer w10: U9.14@1341.46,1851.38 1341.46,1939.54 1243,2038 1243,2222 1404,2383 v1(1923,2383) ; v1(2368,5085) 2578,5085 2670.9,5177.9 3312.9,5177.9 3334,5199 3558.1,5199 3669.1,5310 4114,5310 4439.11,5635.11 4439.11,5857.45 4450,5868.35 4450,5879.53 U15.26@4487.44,5879.53
  Bottom Layer w10: v1(1923,2383) 2017,2383 2099,2465 2099,2661 1993,2767 1993,3815 2031,3853 2031,4748 v1(2368,5085)
NetU10_12: U10.12 U16.19 | length 2955
  Top Layer w10: U10.12@2046.38,3139.72 2006.35,3139.72 1996.07,3150 1996.07,3187 2078.07,3269 2750,3269 2787,3232 3060,3232 3115,3287 3467,3287 3510,3244 3708,3244 3739,3275 4521,3275 4606.59,3360.59 U16.19@4721.38,3360.59
NetU10_13: U10.13 U14.1 | length 2943.6
  Top Layer w10: U10.13@2046.38,3114.13 2000,3114.13 1978,3136.13 1978,3240 2025,3287 2880,3287 2928,3335 2928,3400 2907,3421 2806,3421 2750,3477 2695,3477 2672,3500 2672,3550 2685,3563 2932,3563 2967,3528 3023,3528 3043,3548 3165.1,3548 3280,3662.9 3348.54,3662.9 3386.44,3625 3760,3625 3802.05,3667.05 U14.1@3923.62,3667.05
NetU10_14: U10.14 U12.9 | length 7734.4
  Top Layer w10: U10.14@2046.38,3088.54 2168.54,3088.54 2267.1,3187.1 2459.39,3187.1 2483.63,3162.87 2535.39,3162.87 2559.63,3187.1 v1(3063,3187.1) ; v1(3063,3347) 3198,3482 4130,3482 ; v1(4005,1711) 3985,1711 3972,1698 3972,1630 3987,1615 4102.65,1615 4133.15,1645.5 4449.5,1645.5 4492,1603 4621.96,1603 4689.96,1671 4725.96,1671 4745.96,1651 6788.12,1651 6926.34,1512.78 6926.34,1397 7032.57,1290.77 7032.57,1242.8 U12.9@7078.94,1242.8
  Bottom Layer w10: v1(3063,3187.1) v1(3063,3347) ; v1(4005,1711) 4005,3357 4130,3482
NetU10_17: U10.17 U15.29
NetU10_18: U10.18 U15.15 | length 5287.1
  Top Layer w10: v1(1904,3002) 1919.82,2986.18 U10.18@2046.38,2986.18 ; v1(1970,5457) 2367,5457 2622,5712 2885,5712 3252,6079 3550,6079 3867,5762 4176.23,5762 4188.23,5750 U15.15@4188.23,5706.3
  Bottom Layer w10: v1(1904,3002) 1904,5391 v1(1970,5457)
NetU11_4: U11.4 U15.44 | length 706.8
  Top Layer w10: U15.44@4093.74,6178.74 4093.74,6220 4177.74,6304 4383,6304 4490.69,6196.31 4543.89,6196.31 4576.1,6164.1 4632.21,6164.1 4640,6156.31 U11.4@4640,6133
NetU12_3: U12.3 U17.26 | length 3540.3
  Top Layer w10: U12.3@6858.46,1392.8 6838,1392.8 6826.8,1404 6680,1404 6658,1382 6658,1104 6720,1042 8688,1042 8817,1171 8817,1357.6 8880,1420.6 8920,1420.6 8944.4,1445 8944.4,1509 8808.4,1645 U17.26@8605,1645
NetU12_6: U12.6 U17.13 | length 2501.4
  Top Layer w10: U12.6@6858.46,1242.8 6824.8,1242.8 6812,1230 6812,1177 6924,1065 8415,1065 8470,1120 8647.9,1120 8657.9,1130 8657.9,1160 8647.9,1170 8425,1170 8400,1145 U17.13@8225,1145
NetU12_8: U12.8 U17.11 | length 1167.7
  Top Layer w10: U12.8@7078.94,1192.8 7652,1192.8 7704.2,1245 U17.11@8225,1245
NetU12_11: U12.11 U17.8 | length 1602.6
  Top Layer w10: U12.11@7078.94,1342.8 7277.57,1342.8 7348,1413.23 7418.43,1413.23 7625.2,1620 8268,1620 8295.9,1592.1 8295.9,1410 8280.9,1395 U17.8@8225,1395
NetU15_4: U15.4 U20.19 | length 4422.5
  Top Layer w10: U15.4@4015,6005.51 4041.26,6005.51 4098,5948.77 4098,5897 4175,5820 4385,5820 ; 4515,5690 v1(4790,5690) ; v1(4790,5995) v1(4960,5995) ; v1(5255,3395) 5371.92,3511.92 5425.88,3511.92 5440.59,3497.21 U20.19@5440.59,3461.62
  Bottom Layer w10: 4385,5820 4408.21,5820 4418.21,5810 4418.21,5786.79 4515,5690 ; v1(4790,5690) v1(4790,5995) ; v1(4960,5995) 4960,5898.74 5187.1,5671.64 5187.1,3462.9 v1(5255,3395)
NetU15_31: U15.31 U19.29
NetU15_32: U15.32 U19.56
NetU17_5: U17.5 U17.9 U17.15 U17.19 U17.23 U17.28 U18.3 | length 3980.4
  Top Layer w10: U18.3@6978.46,2297.8 7025,2297.8 v1(7045,2277.8) ; v1(7389,1369) 7420,1369 7522,1471 8080,1471 8106,1497 8106,1541 8110,1545 U17.5@8225,1545 8225,1529 8255,1529 8277.9,1506.1 8277.9,1420.1 8182.2,1420.1 8172.1,1410 8172.1,1369.9 8197,1345 U17.9@8225,1345 8360,1345 8415,1400 8415,1440 8470,1495 8560,1495 ; U17.15@8605,1095 8670.33,1095 8726,1150.67 8726,1341 ; U17.19@8605,1295 8680,1295 8726,1341 ; U17.28@8605,1745 8533,1745 8508,1720 8508,1547 8560,1495 ; 8560,1495 U17.23@8605,1495 8680,1495 8726,1449 8726,1341
  Bottom Layer w10: v1(7045,2277.8) 7045,1713 v1(7389,1369)
RD: U3.24 U4.24 U9.18 U15.28 | length 9519.9
  Top Layer w10: v1(1370,5114) 2045,5114 2183,5252 2400,5252 2413,5265 2413,5338 U3.24@2720,5645 ; U9.18@1443.82,1851.38 1443.82,1900 1467.82,1924 1577,1924 v1(1593,1908) ; v1(2792,6008) 2962,6178 3654,6178 3701,6225 3959.54,6225 4121.54,6063 v1(4419,6063) ; U15.28@4487.44,5942.52 4582.48,5942.52 v1(4585,5940)
  Bottom Layer w10: v1(1370,5114) 1304,5048 1304,2391 1593,2102 v1(1593,1908) ; U4.24@2710,3925 2841.9,4056.9 2841.9,4210 2806.9,4245 2806.9,4256.9 2802,4261.8 2802,4418 2806.9,4422.9 2806.9,5589.19 2780,5616.09 2748.91,5616.09 U3.24@2720,5645 2782,5707 2782,5998 v1(2792,6008) ; v1(4419,6063) 4480,6002 4523,6002 v1(4585,5940)
UCS: U3.22 U9.15 | length 6308.6
  Top Layer w10: U9.15@1367.05,1851.38 1367.05,1953.95 ; v1(1374,5184) 1900,5184 1916,5200 1916,5278 1859,5278 1854,5283 1854,5479 1943,5568 2443,5568 U3.22@2720,5845
  Bottom Layer w10: 1367.05,1953.95 1380,1941 1380,1815 1406,1789 1406,1620 1395,1609 1140,1609 1129,1620 1129,4939 v1(1374,5184)
VCC: "24 MHz.4" C0.1 C1.1 C2.1 C3.1 C4.1 C5.1 C6.1 C7.1 C8.1 C9.1 C10.1 C11.1 C12.1 C13.1 C14.1 C15.1 C16.1 C23.1 C24.1 C25.1 J1.B J1.C LCD1.2 PB1.1 R1.2 R2.1 R4.2 R13.2 R14.1 R15.1 R17.1 R18.1 R19.1 R20.1 R23.1 R24.1 R25.1 R26.1 R27.1 R32.2 R39.1 R42.2 R43.2 RE1.2 RE2.2 U1.9 U1.43 U3.32 U4.32 U5.20 U6.20 U7.20 U8.20 U9.20 U10.20 U11.1 U12.14 U13.4 U14.20 U15.12 U15.34 U16.20 U18.14 U19.7 U19.22 U19.35 U19.50 U20.20 | length 41764.6
  Top Layer w30: C9.1@1185,1970.47 1235.35,1970.47 1268.41,1937.41 ; R20.1@1385,2760 1532,2613 1720,2613 1743.35,2636.35 1743.35,2682.73 1760,2699.38 1817.44,2699.38 1833,2714.94 1833,2804 1871,2842 2097.53,2842 2145.47,2794.06 ; R4.2@1385,3695 1502,3812 1935.47,3812 C5.1@1935.47,3850 ; R25.1@1385,4860 1480.47,4764.53 C6.1@2005,4764.53 2145.79,4764.53 2178.32,4732 2290.79,4732 2323.32,4764.53 2639.53,4764.53 U3.32@2720,4845 2825,4740 3363,4740 3549,4926 3892.26,4926 4359.26,5393 4516.53,5393 4529.53,5380 ; C0.1@1480,6560.47 1533,6560.47 ; PB1.1@1545,6085 1625,6005 1921,6005 1956,6040 1956,6137.47 1533,6560.47 ; R13.2@1665,1650 1616,1601 1616,1600 1566,1550 1160,1550 1119,1509 1119,1311 1140,1290 1305,1290 R19.1@1365,1350 R27.1@1465,1350 R14.1@1565,1350 1633.46,1281.54 1833.46,1281.54 1850.92,1299 1904,1299 R18.1@1955,1350 R26.1@2050,1350 ; U13.4@1810,5340 1810,5472 1815,5477 C13.1@1815,5605.47 ; C2.1@2154.53,2730 2154.53,2785 2145.47,2794.06 ; C3.1@2985.47,6460 2727,6460 2707,6480 2371,6480 2290.53,6560.47 1533,6560.47 ; U1.9@3250,2765 3128.5,2886.5 3037.5,2886.5 2990.47,2933.53 C4.1@2990.47,3005 2990.47,3048.47 3020,3078 ; C14.1@3789.09,3987.05 3789.09,4043.09 ; R17.1@3950,4830 4905,4830 RE1.2@5020,4715 ; 4163.9,1940 4183,1940 4183,1879.47 v1(4149,1845.47) 4230.47,1764 C12.1@4230.47,1760 ; v1(4183,2817) 4240,2817 4289.53,2866.53 ; C8.1@4289.53,2760 4289.53,2800 ; R15.1@4495,6300 4495,6413 4560,6478 4700,6478 4724.53,6453.47 C11.1@4724.53,6425 4724.53,6339.53 4715,6330 U11.1@4715,6235 4790,6235 4820,6205 R1.2@4895,6205 ; C7.1@4500,3829.53 4551.53,3829.53 4582,3860 4582,4000 4524.74,4057.26 ; C15.1@4529.53,5340 4529.53,5380 ; C16.1@4879.53,3250 4879.53,3244 4923.53,3244 ; RE2.2@5020,5620 4888,5488 4577.53,5488 4529.53,5440 4529.53,5380 ; C1.1@5275.47,6090 5275.47,6120 5265.47,6130 5056,6130 4981,6205 R1.2@4895,6205 ; v1(5363,3244) 4923.53,3244 ; v1(5581,3340) 5594,3353 5755.89,3353 5797.89,3311 6740,3311 ; LCD1.2@5905,6695 5905,6572 5616,6283 4973,6283 R1.2@4895,6205 ; C24.1@6190,3035.47 6160,3035.47 6139,3056.47 6139,3177 6143,3181 6610,3181 6740,3311 ; U12.14@7078.94,1492.8 7078.94,1556 7085,1562.06 C23.1@7085,1625.47 ; U18.14@7198.94,2397.8 7198.94,2464 7155,2507.94 C25.1@7155,2575.47 ; v1(7411,2575.47) C25.1@7155,2575.47 ; R39.1@7660,3085 7515,3230 7220,3230 7150,3300 7120,3300 7070,3350 R42.2@7070,3385 R43.2@6840,3385 6766,3311 6740,3311 ; J1.B@8900,1169.72 8845,1224.72 8845,1311.57 J1.C@8900,1366.57 8926.03,1392.6 8945,1392.6 8972.4,1420 8972.4,1565.95 8704.35,1834 7585,1834 7376.47,1625.47 C23.1@7085,1625.47 ; 2145.47,2794.06 C10.1@2145.47,2850 2145.47,2886.47 2160,2901 2483,2901 2574.4,2809.6 2680,2809.6 2710,2839.6 2710,3028 2760,3078 ; 2760,3078 2953,3078 ; 2760,3078 2757,3078 U4.32@2710,3125 2953,3125 2953,3078 ; 2953,3078 3020,3078 ; 3020,3078 3122,3078 3217,3173 3436.02,3173 3449.02,3160 4149.08,3160 4194.55,3114.53 4360,3114.53 ; 3789.09,4043.09 3859,4113 ; 3789.09,4043.09 3789.09,4084.09 3818,4113 3859,4113 ; 3859,4113 3871.93,4125.93 ; 3859,4113 4063,4113 3871.93,4125.93 ; 3871.93,4125.93 4356.36,4125.93 ; 4289.53,2800 4289.53,2866.53 ; 4289.53,2800 4604.06,3114.53 ; 4289.53,2866.53 4537.53,3114.53 ; 4289.53,2866.53 4289.53,3019.55 4277.27,3031.8 4360,3114.53 ; 4356.36,4125.93 4456.07,4125.93 4524.74,4057.26 ; 4356.36,4125.93 4401.29,4081 4455,4081 4478.74,4057.26 4524.74,4057.26 ; 4360,3114.53 4537.53,3114.53 ; 4537.53,3114.53 4604.06,3114.53 ; 4604.06,3114.53 4794.06,3114.53 4904.53,3225 4923.53,3244 ; C23.1@7085,1625.47 6972.34,1625.47 6886,1711.82 6886,2400 7061.47,2575.47 C25.1@7155,2575.47
  Bottom Layer w30: 1268.41,1937.41 1340,2009 1380,2009 1408,1981 1408,1907 R13.2@1665,1650 1665,2385 R2.1@1385,2665 R20.1@1385,2760 1332,2813 1332,2902 R23.1@1385,2955 1332,3008 1332,3202 R24.1@1385,3255 1332,3308 1332,3501 1385,3554 R4.2@1385,3695 1334,3746 1334,4523 1385,4574 R25.1@1385,4860 ; PB1.1@1545,6085 1545,5184 ; 1815,5605.47 1819,5520 1819,5458 1545,5184 ; U1.43@3250,1765 3281.8,1765 3333.9,1817.1 3375,1817.1 3397.9,1840 3397.9,1912.9 3202.1,2108.7 3202.1,2685.3 3250,2733.2 U1.9@3250,2765 ; 3871.93,4125.93 3984.39,4125.93 4018.46,4160 4018.46,4598.46 3950,4666.92 R17.1@3950,4830 ; v1(4149,1845.47) 4183,1879.47 v1(4183,2817) ; R1.2@4895,6205 4895,5745 RE2.2@5020,5620 RE1.2@5020,4715 ; v1(5363,3244) 5485,3244 v1(5581,3340) ; v1(7411,2575.47) 7411,2761 R32.2@7515,2865 7515,2902 7660,3047 R39.1@7660,3085 ; R25.1@1385,4860 1545,5020 1545,5100 ; R25.1@1385,4860 1385,4940 1545,5100 ; 1545,5100 1545,5184
WR: U3.31 U4.29 U9.17 U15.27 | length 4876.5
  Top Layer w10: U9.17@1418.23,1851.38 1418.23,1926.23 1440,1948 1825,1948 1864.89,1908.11 1864.89,1840 1879.89,1825 2160,1825 v1(2198,1863) ; v1(2172,3405) 2192,3425 U4.29@2710,3425 ; v1(2521,4945) U3.31@2720,4945
  Bottom Layer w10: v1(2172,3405) 2172,2372 2198,2346 v1(2198,1863) ; v1(2521,4945) 2521,3977.47 2509,3965.47 2509,3781.47 2536,3754.47 2536,3599 U4.29@2710,3425
pads on no net: "24 MHz.1" J1. J2.20 J2.21 J2.27 J2.29 J2.32 J2.39 RE1. RE2. S1.3 S1.4 S2.3 S2.4 S3.3 S3.4 S4.3 S4.4 S5.3 S5.4 S6.3 S6.4 S7.3 S7.4 U1.22 U1.23 U1.48 U1.52 U1.53 U1.54 U1.58 U1.64 U2.1 U2.4 U2.5 U2.6 U2.8 U8.6 U8.7 U8.8 U8.9 U8.12 U8.13 U8.14 U8.15 U8.16 U8.17 U9.11 U9.12 U9.13 U10.15 U10.16 U11.6 U15.2 U15.5 U15.6 U15.7 U15.8 U15.9 U15.10 U15.14 U15.17 U15.18 U15.19 U15.20 U15.21 U15.22 U15.24 U15.25 U15.30 U15.33 U15.35 U15.36 U16.6 U16.7 U16.8 U16.9 U16.11 U16.12 U16.13 U16.14 U17.1 U17.7 U17.12 U17.14 U17.22 U18.4 U18.5 U18.6 U18.8 U18.9 U18.10 U18.11 U18.12 U18.13
copper on no net: | length 28262.7
  Top Layer w10: v1(1866,3155) 1983.64,3037.36 2046.38,3037.36 ; 2602,5270 2609.9,5277.9 2946.88,5277.9 3065.11,5396.13 4149.31,5396.13 4345.71,5592.53 4345.71,5706.3 ; 3764,5956 3764,6105 ; 3814,6105 3814,6152 3840,6178 3920,6178 3867.5,6125.5 3990,6003 ; 3865,6105 3865,5936 3949.1,5851.9 ; 3915,6105 3915,6028.4 4041.5,5901.9 ; 4125.24,6178.74 4125.24,6140 4101.24,6116 4094,6116 4061,6149 4061,6307.56 4278.44,6525 4778,6525 4880,6423 4880,6353 4900,6333 5560,6333 5855,6628 5855,6730.9 5862,6737.9 6262.1,6737.9 6305,6695 ; v1(4136,5953) 4161,5978 4293.02,5978 4487.44,5974.02 ; 4314.21,5621.79 4314.21,5706.3 ; 4362,6097.8 4377.2,6113 4377.2,6178.74 ; 4487.44,6037.01 4496.19,6045.76 4522.45,6045.76 4545.45,6068.77 4545.45,6074.81 4561.26,6059 4592.74,6059 4608.74,6075 4670.85,6075 4681.75,6064.1 4748.25,6064.1 4759.15,6075 4979,6075 5467,5587 7833,5587 v1(8384,5036) ; 4577,6003 4584,5996 4684,5996 4750.93,5929.07 4975.93,5929.07 5044,5861 v1(5044,5761) ; 4788.1,5901.9 5020,5670 ; 6196.34,2413.5 6246.5,2413.5 6264,2396 6424.27,2396 6474,2445.73 6474,2762 6291,2945 ; 6196.34,2945 6291,2945 ; v1(6250,2986) 6291,2945
  Top Layer w30: 3823.66,1145 3823.66,1145.66 3901.74,1223.74 3902.4,1223.74 3981.14,1223.74 4059.88,1223.74 4116.14,1280 4161.1,1280 4217.36,1223.74 4299.62,1306 4528.8,1306 4611.06,1223.74 4611.06,1281.06 4680,1350 4785,1350 4817,1318 4817,1193.46 4768.54,1145
  Bottom Layer w10: v1(1866,3155) 1866,5461 1960,5555 2176,5555 2388,5767 2388,6226 2573.62,6411.62 3528.38,6411.62 3987,5953 v1(4136,5953) ; 4983,5700 v1(5044,5761) ; v1(6250,2986) 6219,3017 6219,4595 6305,4681 6305,6695 ; v1(8384,5036) 8384,3436 8351.8,3403.8 8351.8,1884.8 8269,1802 8269,1748 8650.43,1366.57 8900,1366.57 8945,1321.57 8945,1214.72 8900,1169.72

## Polygon pours and split planes (outlines as drawn)
no net on Top Layer "Top Layer-No Net 2" (hatched 90Degree grid 10 track 15, remove dead copper, shelved, pour order 4): 5070,6745 5680,6745 5680,6145 5070,6145
no net on Top Layer "Top Layer-No Net 1" (hatched 90Degree grid 10 track 15, remove dead copper, shelved, pour order 6): 5070,6745 5680,6745 5680,6145 5070,6145
no net on Top Layer "Top Layer-No Net" (hatched 90Degree grid 10 track 15, remove dead copper, shelved, pour order 8): 5070,6745 5820,6745 5820,6145 5070,6145

## Keep-outs
Keep-Out Layer:
  lines w10: 1965,5505 2265,5505

## Other copper
Top Layer:
  text ".LAYER_NAME" at 1015,7235 h100
Bottom Layer:
  text ".LAYER_NAME" at 1015,7235 h100

## Silkscreen, mask and mechanical layers (free items; w line width, h text height)
Top Overlay:
  text ".LAYER_NAME" at 1015,7235 h100
Bottom Overlay:
  text ".LAYER_NAME" at 1015,7235 h100
Top Solder:
  text ".LAYER_NAME" at 1015,7235 h100
Bottom Solder:
  text ".LAYER_NAME" at 1015,7235 h100
Drill Guide:
  text ".LAYER_NAME" at 1015,7235 h100